# Altium PCB 智能家居-电灯.PcbDoc
Units mm, origin at the board's own origin, x right, y up, seen from the top; angles counter-clockwise.
Board outline 43.05 x 39.75 mm, 2 copper layers (Top Layer, Bottom Layer); 32 components, 24 nets, 83 pads, 0 vias.
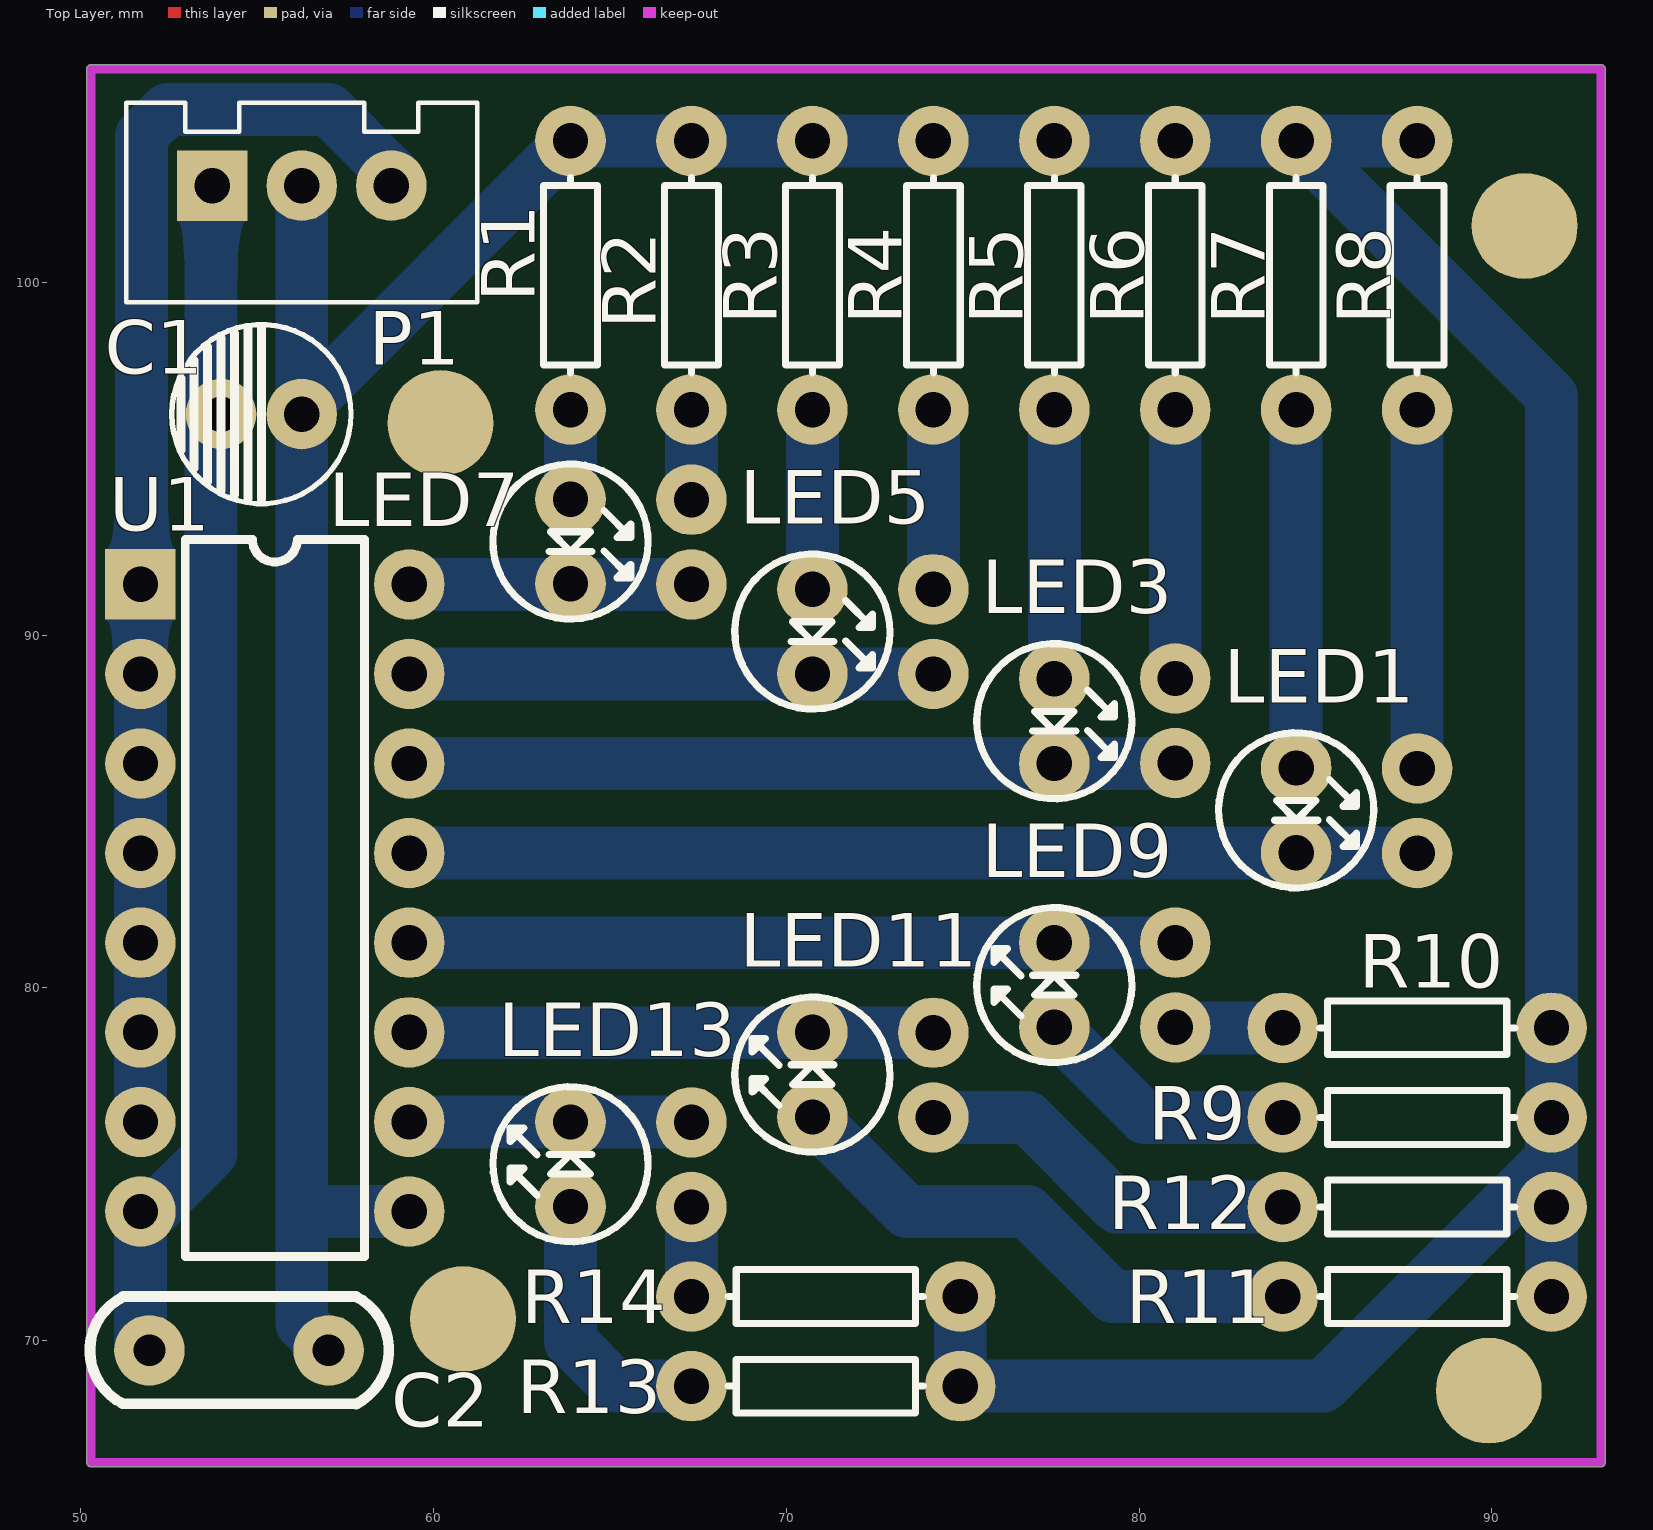
[diagram p0: Top Layer view]
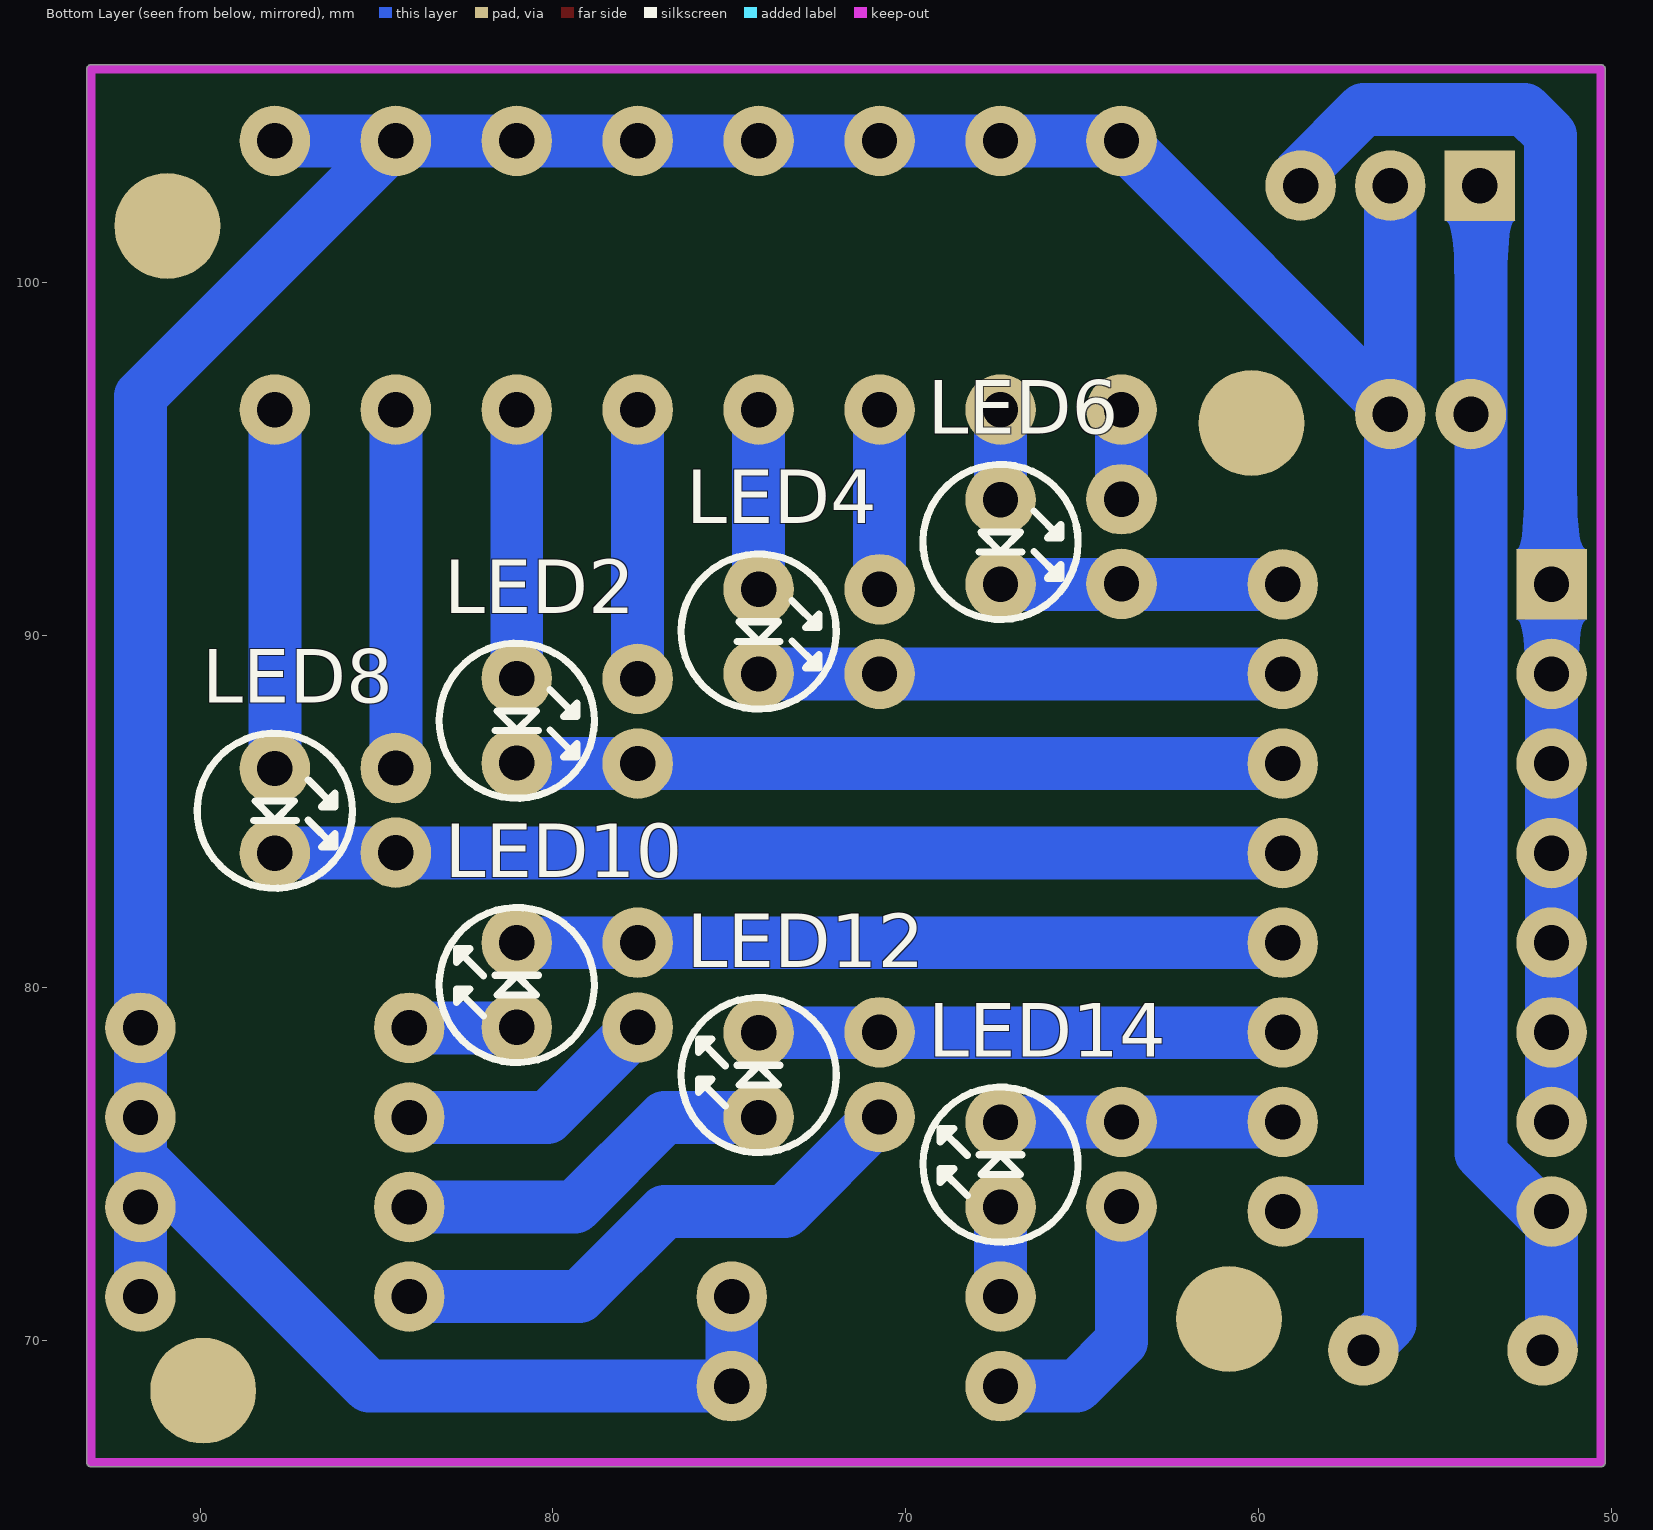
[diagram p1: Bottom Layer view, seen from below]

## Layer stack, top to bottom
Top Solder: solder mask 0.0102, Solder Resist, Dk 3.5
Top Layer: signal copper 0.0356
Dielectric 1: dielectric 0.32, FR-4, Dk 4.8
Bottom Layer: signal copper 0.0356
Bottom Solder: solder mask 0.0102, Solder Resist, Dk 3.5

## Board outline
50.292,66.421 cw(c50.292,66.548) 50.165,66.548 50.165,106.045 cw(c50.292,106.045) 50.292,106.172 93.091,106.172 cw(c93.091,106.045) 93.218,106.045 93.218,66.548 cw(c93.091,66.548) 93.091,66.421

## Design rules (kind name [scope] priority, off if disabled: settings)
Clearance [All] p1: gap=0.254
PolygonConnect [All] p1: connectstyle=Relief reliefconductorwidth=0.254 reliefentries=4 polygonreliefangle="90 Angle" airgapwidth=0.254
RoutingVias [All] p1: holewidth=0.711 width=1.27 viastyle="Through Hole" minholewidth=0.711 minwidth=1.27 maxholewidth=0.711 maxwidth=1.27
SolderMaskExpansion [All] p1: expansion=0.102
Width [All] p1: maxlimit=9 minlimit=1 preferedwidth=1 minimp=50.000000 maximp=50.000000 favimp=50.000000
30 further rules are at their usual default settings.

## Components (designator, comment, footprint, x,y, rotation, side; value= is the part's Value field where it differs from the comment)
C1 "Cap Pol1" CD5 56.261,96.266 r270 top
C2 "0.01uF" 0.1UF 54.483,69.723 r0 top
LED1 "LED0" LED-3 84.455,86.233 r270 top
LED2 "LED0" LED-3 81.026,88.773 r270 bottom
LED3 "LED0" LED-3 77.597,88.76 r270 top
LED4 "LED0" LED-3 74.168,91.3 r270 bottom
LED5 "LED0" LED-3 70.739,91.3 r270 top
LED6 "LED0" LED-3 67.31,93.84 r270 bottom
LED7 "LED0" LED-3 63.881,93.853 r270 top
LED8 "LED0" LED-3 87.884,86.22 r270 bottom
LED9 "LED0" LED-3 77.597,78.88 r90 top
LED10 "LED0" LED-3 81.026,78.88 r90 bottom
LED11 "LED0" LED-3 70.739,76.34 r90 top
LED12 "LED0" LED-3 74.168,76.327 r90 bottom
LED13 "LED0" LED-3 63.881,73.8 r90 top
LED14 "LED0" LED-3 67.31,73.787 r90 bottom
P1 "Header 3" TJC3-3A 56.265,102.743 r180 top
R1 "Res1" AXIAL-0.3 63.881,100.203 r90 top
R2 "Res1" AXIAL-0.3 67.31,100.203 r90 top
R3 "Res1" AXIAL-0.3 70.739,100.203 r90 top
R4 "Res1" AXIAL-0.3 74.168,100.203 r90 top
R5 "Res1" AXIAL-0.3 77.597,100.203 r90 top
R6 "Res1" AXIAL-0.3 81.026,100.203 r90 top
R7 "Res1" AXIAL-0.3 84.455,100.203 r90 top
R8 "Res1" AXIAL-0.3 87.884,100.203 r90 top
R9 "Res1" AXIAL-0.3 87.884,76.327 r0 top
R10 "Res1" AXIAL-0.3 87.884,78.867 r0 top
R11 "Res1" AXIAL-0.3 87.884,71.247 r0 top
R12 "Res1" AXIAL-0.3 87.884,73.787 r0 top
R13 "Res1" AXIAL-0.3 71.12,68.707 r0 top
R14 "Res1" AXIAL-0.3 71.12,71.247 r0 top
U1 "ULN2003" DIP16 51.689,91.44 r0 top

## Footprints (in the part's own frame and the unit in brackets; to place one, negate y for a bottom-side part, rotate by r counter-clockwise, add the part's x,y. Pads: shape width x height; smd on the part's side, far side on the other; paste and mask are expansions set on the pad)
0.1UF [mm]
  round 2 hole 0.9: 1(-2.54,0) 2(2.54,0)
  silkscreen extent -4.22,-1.52 4.25,1.53
AXIAL-0.3 [mm] "Axial Device, Thru-Hole; 2 Leads; 0.3 in Pin Spacing"
  round 2 hole 1: 1(-3.81,0) 2(3.81,0)
  silkscreen extent -2.77,-0.76 2.77,0.76
CD5 [mm]
  round 2 hole 1: 1(0,0) 2(0,-2.286)
  silkscreen extent -2.54,-3.68 2.54,1.4
DIP16 [mm]
  rect 2x2 hole 1: 1(0,0)
  round 2 hole 1: 2(0,-2.54) 3(0,-5.08) 4(0,-7.62) 5(0,-10.16) 6(0,-12.7) 7(0,-15.24) 8(0,-17.78) 9(7.62,-17.78) 10(7.62,-15.24) 11(7.62,-12.7) 12(7.62,-10.16) 13(7.62,-7.62) 14(7.62,-5.08) 15(7.62,-2.54) 16(7.62,0)
  silkscreen extent 1.27,-19.05 6.35,1.27
LED-3 [mm]
  round 2 hole 1: 1(0,0) 2(2.4,0)
  silkscreen extent -1,-2.2 3.4,2.2
TJC3-3A [mm]
  rect 2x2 hole 1: 1(2.544,0)
  round 2 hole 1: 2(0.004,0) 3(-2.536,0)
  silkscreen extent -4.97,-2.35 4.97,3.3

## Part data
C1: "Polarized Capacitor (Radial)"
C2: library part C
LED1 LED2 LED3 LED4 LED5 LED6 LED7 LED8 LED9 LED10 LED11 LED12 LED13 LED14: "Typical INFRARED GaAs LED"
P1: "Header, 3-Pin"
R1 R2 R3 R4 R5 R6 R7 R8 R9 R10 R11 R12 R13 R14: "Resistor"

## Free pads (board coordinates)
  round 3 all layers, no hole: 2(60.198,96.012) 3(90.932,101.6) 4(60.833,70.612) 5(89.916,68.58)

## Nets (pads, with @x,y where several pads share a name; then routed paths per layer and width w, separated by ;. In a path a pad name is that pad's centre, name@x,y a point inside that pad or via, vN(x,y) a via of type N, cw(c..) or ccw(c..) an arc to the next point about the centre after c; other vN are vias at no path point)
GND: C1.2 C2.1 P1.1 U1.8 | length 33.9
  Bottom Layer w1.5: C2.1 51.689,69.977 U1.8 52.042,73.66 53.693,75.311 P1.1@53.693,102.489
LED: P1.3 U1.1 U1.2 U1.3 U1.4 U1.5 U1.6 U1.7 | length 36.5
  Bottom Layer w1.5: U1.6@51.685,78.736 U1.6 ; U1.7 U1.6 ; P1.3 58.801,103.124 57.023,104.902 52.451,104.902 51.717,104.168 51.717,91.468 U1.1 U1.2 U1.3 U1.4 U1.5 U1.6
NetLED1_1: LED1.1 R7.1 | length 10.2
  Bottom Layer w1.5: LED1.1 R7.1
NetLED1_2: LED1.2 LED8.2 U1.13 | length 28.6
  Bottom Layer w1.5: U1.13 LED8.2
NetLED2_1: LED2.1 R6.1 | length 7.6
  Bottom Layer w1.5: LED2.1 R6.1
NetLED2_2: LED2.2 LED3.2 U1.14 | length 21.7
  Bottom Layer w1.5: U1.14 LED3.2 81.013,86.36 LED2.2
NetLED3_1: LED3.1 R5.1 | length 7.6
  Bottom Layer w1.5: LED3.1 R5.1
NetLED4_1: LED4.1 R4.1 | length 5.1
  Bottom Layer w1.5: LED4.1 R4.1
NetLED4_2: LED4.2 LED5.2 U1.15 | length 14.9
  Bottom Layer w1.5: U1.15 LED5.2 LED4.2
NetLED5_1: LED5.1 R3.1 | length 5.1
  Bottom Layer w1.5: LED5.1 R3.1
NetLED6_1: LED6.1 R2.1 | length 2.6
  Bottom Layer w1.5: LED6.1 R2.1
NetLED6_2: LED6.2 LED7.2 U1.16 | length 8
  Bottom Layer w1.5: U1.16 LED6.2
NetLED7_1: LED7.1 R1.1 | length 2.5
  Bottom Layer w1.5: LED7.1 R1.1
NetLED8_1: LED8.1 R8.1 | length 10.2
  Bottom Layer w1.5: LED8.1 R8.1
NetLED9_1: LED9.1 R9.1 | length 7.5
  Bottom Layer w1.5: LED9.1 80.15,76.327 R9.1
NetLED9_2: LED9.2 LED10.2 U1.12 | length 21.7
  Bottom Layer w1.5: U1.12 LED9.2 LED10.2
NetLED10_1: LED10.1 R10.1 | length 3.1
  Bottom Layer w1.5: LED10.1 81.039,78.867 R10.1
NetLED11_1: LED11.1 R11.1 | length 15.4
  Bottom Layer w1.5: LED11.1 73.419,73.66 76.835,73.66 79.248,71.247 R11.1
NetLED11_2: LED11.2 LED12.2 U1.11 | length 14.9
  Bottom Layer w1.5: U1.11 59.322,78.727 LED12.2
NetLED12_1: LED12.1 R12.1 | length 11
  Bottom Layer w1.5: LED12.1 76.835,76.327 79.375,73.787 R12.1
NetLED13_1: LED13.1 R13.1 | length 7.8
  Bottom Layer w1.5: LED13.1 63.881,69.977 65.151,68.707 R13.1
NetLED13_2: LED13.2 LED14.2 U1.10 | length 8
  Bottom Layer w1.5: U1.10 LED13.2 67.297,76.2 LED14.2
NetLED14_1: LED14.1 R14.1 | length 2.5
  Bottom Layer w1.5: R14.1 LED14.1
VCC: C1.1 C2.2 P1.2 R1.2 R2.2 R3.2 R4.2 R5.2 R6.2 R7.2 R8.2 R9.2 R10.2 R11.2 R12.2 R13.2 R14.2 U1.9 | length 128.3
  Bottom Layer w1.5: P1.2 C1.1@56.261,96.393 ; 56.896,73.66 U1.9 ; C2.2 56.261,70.485 C1.1 C1.1@56.261,96.393 ; R14.2 R13.2 85.217,68.707 91.694,75.184 ; R8.2 R7.2 ; R11.2 R12.2 91.694,75.184 ; C1.1@56.261,96.393 R1.2 R2.2 R3.2 R4.2 R5.2 R6.2 R7.2 ; R7.2 91.694,96.774 R10.2 R9.2 91.694,75.184

## Keep-outs
Keep-Out Layer:
  lines w0.254: 50.292,66.548 93.091,66.548 93.091,106.045 50.292,106.045 50.292,66.548

## Dimensions
50.292,66.548 to 93.091,66.548 on Keep-Out Layer
50.292,66.548 to 50.292,106.045 on Keep-Out Layer